# EAGLE board led-test-1 (EAGLE 8.4.0)
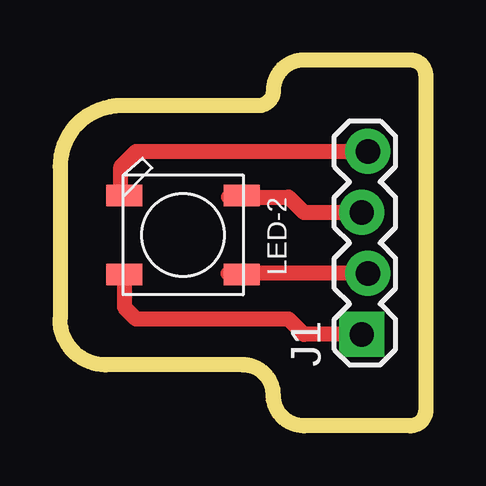
[diagram p0: board, top side]

Size 15.24 x 15.24 mm. Coordinates in mm from the lower left corner, seen from the top.
Outline: 15.24,14.61 15.24,0.64 arc-90 14.61,0 10.16,0 arc-90 8.89,1.27 arc90 7.62,2.54 1.91,2.54 arc-90 0,4.45 0,10.8 arc-90 2.54,13.34 8.26,13.34 arc90 8.89,13.97 arc-90 10.16,15.24 14.61,15.24 arc-90 15.24,14.61
Copper layers (1*16): Top 0.035mm / dielectric 1.5mm / Bottom 0.035mm
Design rules "default": minimum track width 6mil, minimum drill 0.35mm, track to track 6mil, track to pad 6mil, pad to pad 6mil, via to via 6mil, smd to smd 6mil, copper to edge 40mil, drill to drill 6mil, minimum pad ring 10mil, minimum via ring 8mil, stop-mask expansion 4mil, vias tented up to drill 0mil, thermal gap 10mil

## Footprints (pad centres in the part's own frame; a part is rotated, then mirrored left to right if it is on the bottom)
1X04_LOCK = drill 1.016 pad 1.88 square: 1 0,0.127 | drill 1.016 pad 1.88: 2 2.54,-0.127; 3 5.08,0.127; 4 7.62,-0.127
WS2812B = smd 1.5 x 0.9: 1-VDD 2.45,-1.65; 2-DOUT 2.45,1.65; 3-GND -2.45,1.65; 4-DIN -2.45,-1.65

## Placement (x,y rotation side)
J1  [1X04_LOCK]  12.7,3.81 90 top
LED-2  WS2812B5050  [WS2812B]  5.13,7.95 0 top

## Library data of the parts
J1 = SparkFun-Connectors; PROD_ID: CONN-09696
LED-2 = adafruit

## Nets
N$1: J1.1 LED-2.4-DIN
N$2: J1.2 LED-2.1-VDD
N$3: J1.3 LED-2.2-DOUT
N$4: J1.4 LED-2.3-GND

## Tracks (layer width: path | path; a pad name or v marks a point on that pad's centre or on a via)
N$1
  Top 0.635: LED-2.4-DIN 2.68,4.94 3.18,4.45 9.53,4.45 10.16,3.81 J1.1
N$2
  Top 0.635: J1.2 7,6.35 LED-2.1-VDD
N$3
  Top 0.635: LED-2.2-DOUT 7.02,9.52 9.53,9.52 10.16,8.89 J1.3
N$4
  Top 0.635: LED-2.3-GND 2.54,9.74 2.54,10.8 3.18,11.43 J1.4

## Text on the board
_tNames: LED-2 | J1